# Altium PCB Bobokeros.PcbDoc
Units mm, origin at the board's own origin, x right, y up, seen from the top; angles counter-clockwise.
Board outline 100 x 50 mm, 2 copper layers (Top Layer, Bottom Layer); 68 components, 58 nets, 268 pads, 58 vias.
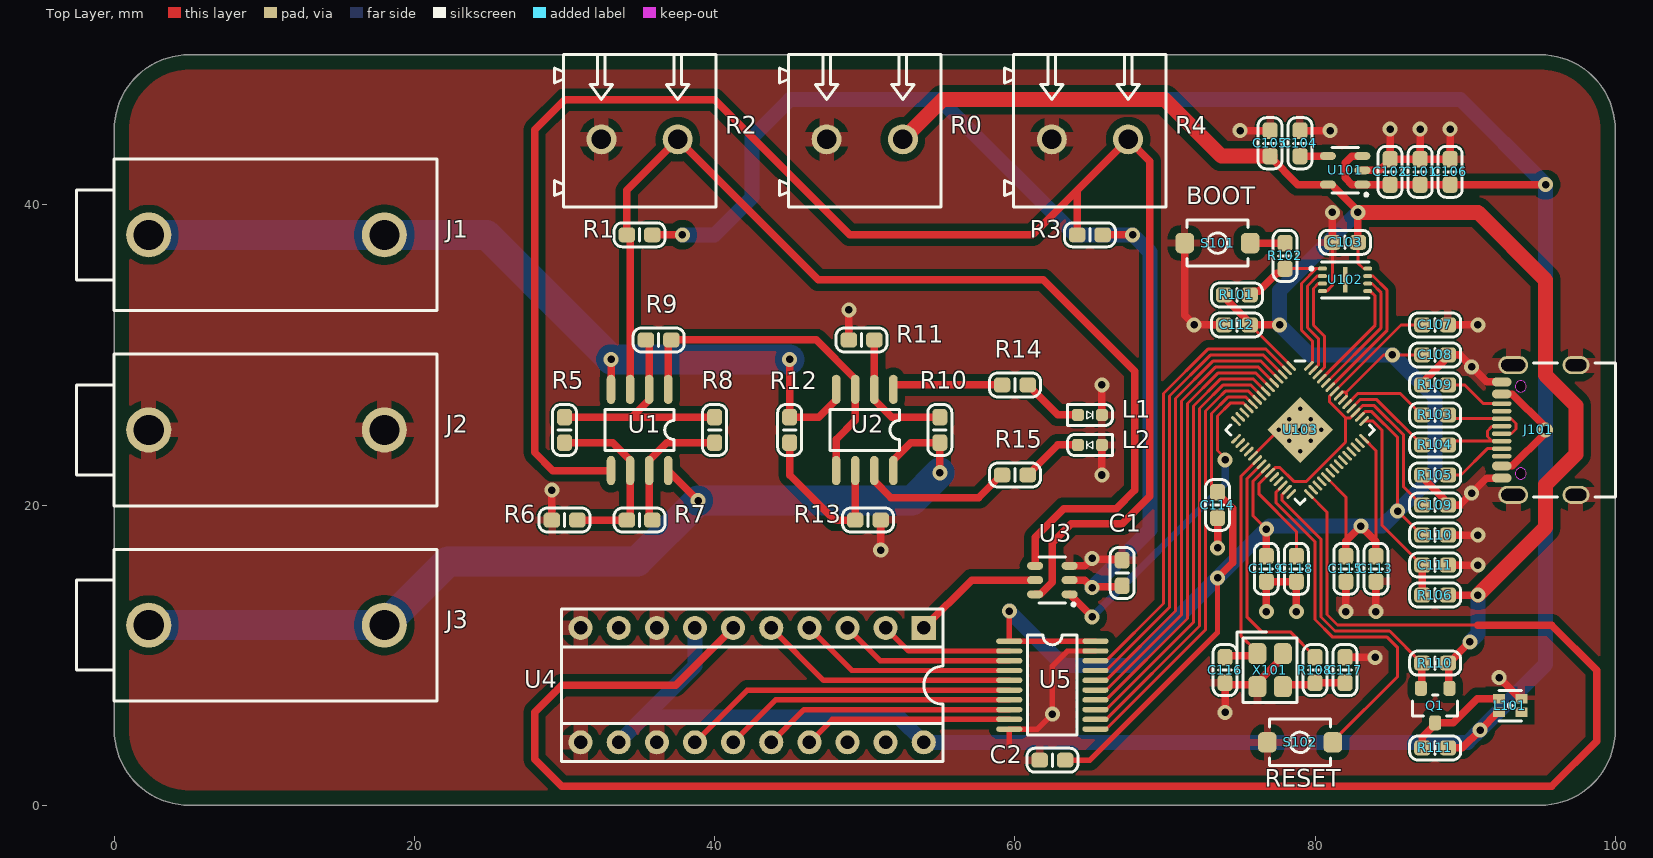
[diagram p0: Top Layer view]
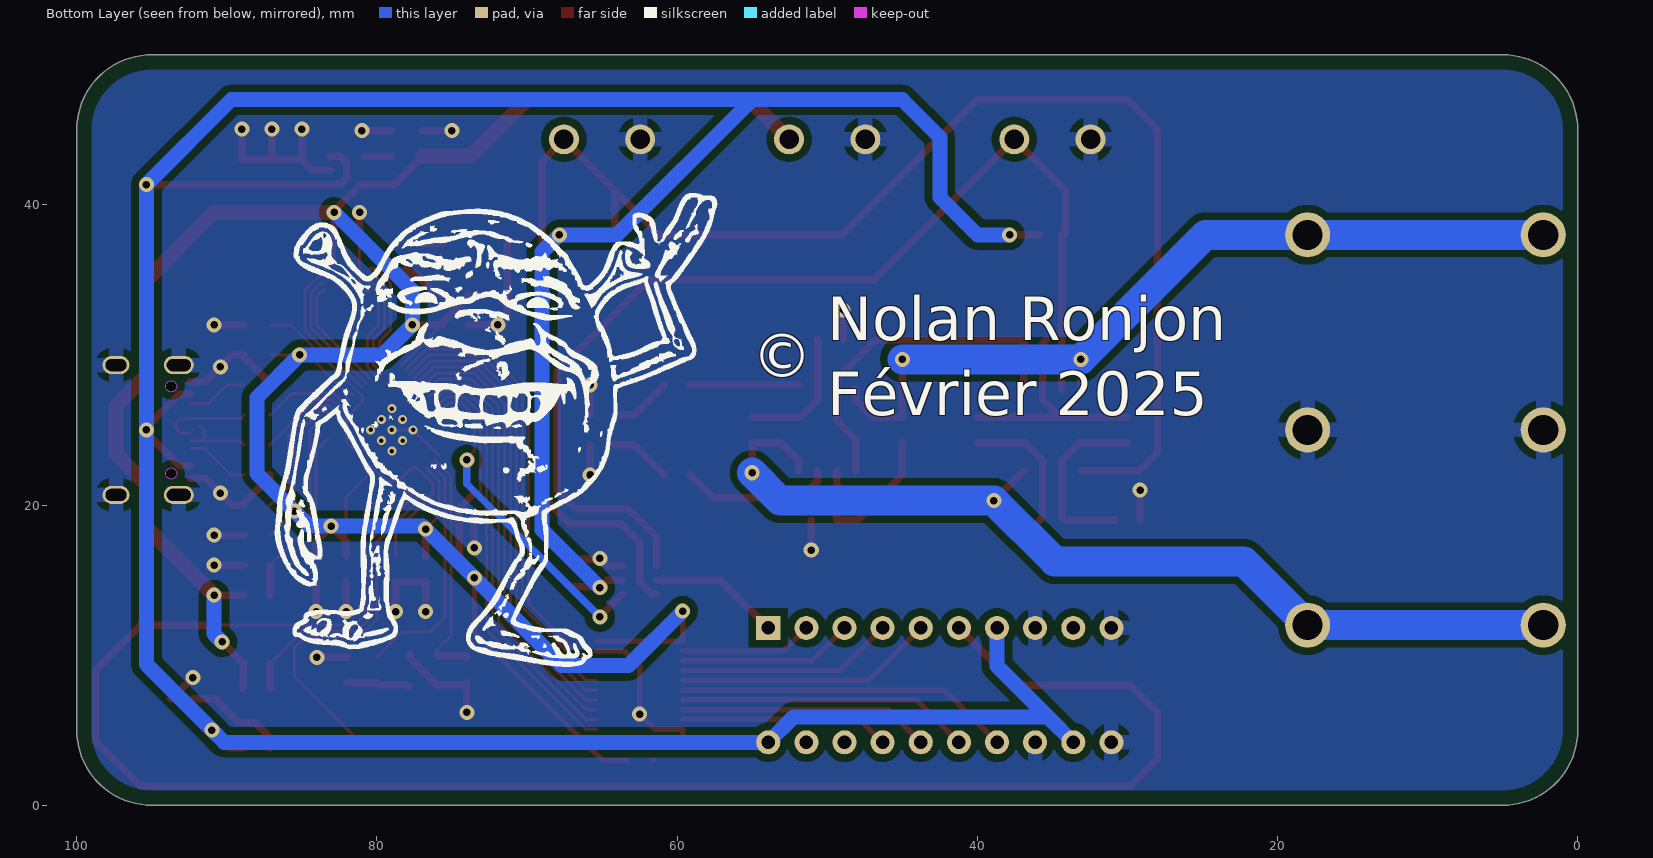
[diagram p1: Bottom Layer view, seen from below]

## Layer stack, top to bottom
Top Solder: solder mask 0.0102, Solder Resist, Dk 3.5
Top Layer: signal copper 0.0356
Dielectric 1: dielectric 0.32, FR-4, Dk 4.8
Bottom Layer: signal copper 0.0356
Bottom Solder: solder mask 0.0102, Solder Resist, Dk 3.5

## Board outline
0,5 0,45 cw(c5,45) 5,50 95,50 cw(c95,45) 100,45 100,5 cw(c95,5) 95,0 5,0 cw(c5,5)

## Design rules (kind name [scope] priority, off if disabled: settings)
BoardOutlineClearance [All] p1: gap=0 ignorepadtopadclearanceinfootprint=FALSE except(1: Poly-OutlineEdge Region-OutlineEdge)
Clearance [All] p1: gap=0.1 ignorepadtopadclearanceinfootprint=FALSE except(0.2: Track-Track Track-SMDPad; 0.5: Arc-Poly Track-Poly SMDPad-Poly THPad-Poly Via-Poly Fill-Poly Poly-Poly Poly-Region Poly-Text Poly-Hole)
ComponentClearance [All] p1: gap=0 collisioncheckmode=3 verticalgap=0 showdistances=FALSE
DiffPairsRouting [All] p1: maxlimit=1 minlimit=0.1 mostfreqgap=0.2 toplayer_minwidth=0.1 toplayer_maxwidth=1 toplayer_prefwidth=0.2 bottomlayer_minwidth=0.1 bottomlayer_maxwidth=1 bottomlayer_prefwidth=0.2 maxuncoupledlength=12.7
MinimumSolderMaskSliver [All] p1: minsoldermaskwidth=0
PlaneConnect [All] p1: pad.planeconnectstyle=Relief pad.reliefexpansion=1 pad.reliefentries=4 pad.reliefconductorwidth=0.5 pad.reliefairgap=0.5 via.planeconnectstyle=Direct via.reliefexpansion=1 via.reliefentries=4 via.reliefconductorwidth=0.5 via.reliefairgap=0.5
PolygonConnect [All] p1: thpad.connectstyle=Relief thpad.reliefconductorwidth=1 thpad.reliefentries=4 thpad.polygonreliefangle="90 Angle" thpad.airgapwidth=0.5 smdpad.connectstyle=Relief smdpad.reliefconductorwidth=0.5 smdpad.reliefentries=4 smdpad.polygonreliefangle="90 Angle" smdpad.airgapwidth=0.5 via.connectstyle=Direct via.reliefconductorwidth=0.254 via.reliefentries=4 via.polygonreliefangle="90 Angle" via.airgapwidth=0.254
RoutingVias [All] p1: holewidth=0.5 width=1 viastyle="Through Hole" minholewidth=0.2 minwidth=0.5 maxholewidth=1 maxwidth=2
SilkToSilkClearance [All] p1: silktosilkclearance=0
SilkToSolderMaskClearance [IsPad] p1: minsilkscreentomaskgap=0.1 clearancetoexposedcopper=TRUE
SolderMaskExpansion [All] p1: expansion=0.1 istentingtop=FALSE
SupplyNets "Schematic Supply Nets_5" [InNet('+5V')] p1: voltage=0.000
SupplyNets "Schematic Supply Nets_4" [InNet('GND')] p2: voltage=0.000
SupplyNets "Schematic Supply Nets_3" [InNet('+1.1V')] p3: voltage=0.000
SupplyNets "Schematic Supply Nets_2" [InNet('+3.3V')] p4: voltage=0.000
SupplyNets "Schematic Supply Nets_1" [InNet('-12V')] p5: voltage=0.000
SupplyNets "Schematic Supply Nets" [InNet('+12V')] p6: voltage=0.000
Width [All] p1: maxlimit=2 minlimit=0.1 preferedwidth=0.5
24 further rules are at their usual default settings.

## Classes and differential pairs
component class TraitementNumerique: C101 C102 C103 C104 C105 C106 C107 C108 C109 C110 C111 C112 C113 C114 C115 C116 C117 C118 C119 Condensateur J101 L101 Q1 R101 R102 R103 R104 R105 R106 R108 R109 R110 R111 S101 S102 U101 U102 U103 X101
component class TraitementAnalogique: C1 C2 Condensateur J1 J2 J3 L1 L2 R0 R1 R2 R3 R4 R5 R6 R7 R8 R9 R10 R11 R12 R13 R14 R15 U1 U2 U3 U4 U5
differential pair USB: +USB_P -USB_N

## Components (designator, comment, footprint, x,y, rotation, side; value= is the part's Value field where it differs from the comment)
C1 "Condensateur" 0603 67.149,15.475 r90 top value=100nF
C2 "Condensateur" 0603 62.5,3 r0 top value=100nF
C101 "Condensateur" 0603 87,42.2 r90 top locked value=2.2µF
C102 "Condensateur" 0603 85,42.2 r90 top locked value=2.2µF
C103 "Condensateur" 0603 82,37.5 r0 top locked value=1µF
C104 "Condensateur" 0603 79,44.1 r90 top locked value=100nF
C105 "Condensateur" 0603 77,44.1 r90 top locked value=1µF
C106 "Condensateur" 0603 89,42.2 r90 top locked value=2.2µF
C107 "Condensateur" 0603 88,32 r180 top locked value=22nF
C108 "Condensateur" 0603 88,30 r180 top locked value=100nF
C109 "Condensateur" 0603 88,20 r180 top locked value=2.2µF
C110 "Condensateur" 0603 88,18 r180 top locked value=2.2µF
C111 "Condensateur" 0603 88,16 r180 top locked value=2.2µF
C112 "Condensateur" 0603 74.793,32 r0 top locked value=100nF
C113 "Condensateur" 0603 84.05,15.75 r90 top value=100nF
C114 "Condensateur" 0603 73.5,20 r90 top locked value=100nF
C115 "Condensateur" 0603 82.05,15.75 r90 top value=100nF
C116 "Condensateur" 0603 74,9 r270 top locked value=15pF
C117 "Condensateur" 0603 82,9 r90 top locked value=15pF
C118 "Condensateur" 0603 78.75,15.75 r90 top locked value=100nF
C119 "Condensateur" 0603 76.75,15.75 r90 top locked value=100nF
J1 "Fiche Banane" "Fiche Banane" 10.15,38 r180 top locked
J2 "Fiche Banane" "Fiche Banane" 10.15,25 r180 top locked
J3 "Fiche Banane" "Fiche Banane" 10.15,12 r180 top locked
J101 "USB-C" USB-C 94.906,25 r90 top locked
L1 "LED Verte" "0603 (Pol)" 65,26 r180 top locked
L2 "LED Rouge" "0603 (Pol)" 65,24 r0 top locked
L101 "WS2812B" SMD1615 93,6.641 r180 top locked
Q1 "2N7002" SOT-23 88,6.641 r90 top locked
R0 "Resistance" Bornier 50,44.362 r0 top locked value=18Ω
R1 "Resistance" 0603 35,38 r0 top locked value=5kΩ
R2 "CTN" Bornier 35,44.362 r0 top locked value="5kΩ (25°C)"
R3 "Resistance" 0603 65,38 r0 top locked value=5kΩ
R4 "CTN" Bornier 65,44.362 r0 top locked value="5kΩ (25°C)"
R5 "Resistance" 0603 30,25 r90 top locked value=10kΩ
R6 "Resistance" 0603 30,19 r0 top locked value=100kΩ
R7 "Resistance" 0603 35,19 r180 top locked value=25kΩ
R8 "Resistance" 0603 40,25 r90 top locked value=25kΩ
R9 "Resistance" 0603 36.27,31 r180 top locked value=100kΩ
R10 "Resistance" 0603 55,25 r270 top locked value=10kΩ
R11 "Resistance" 0603 49.785,31 r0 top locked value=1kΩ
R12 "Resistance" 0603 45,25 r90 top locked value=10kΩ
R13 "Resistance" 0603 50.215,19 r180 top locked value=1kΩ
R14 "Resistance" 0603 60,28 r180 top locked value=600Ω
R15 "Resistance" 0603 60,22 r180 top locked value=600Ω
R101 "Resistance" 0603 74.793,34 r180 top locked value=NC
R102 "Resistance" 0603 78,36.6 r90 top locked value=1kΩ
R103 "Resistance" 0603 88,26 r0 top locked value=27Ω
R104 "Resistance" 0603 88,24 r0 top locked value=27Ω
R105 "Resistance" 0603 88,22 r0 top locked value=5.1kΩ
R106 "Resistance" 0603 88,14 r180 top locked value=200Ω
R108 "Resistance" 0603 80,9 r90 top locked value=1kΩ
R109 "Resistance" 0603 88,28 r0 top locked value=5.1kΩ
R110 "Resistance" 0603 88,9.466 r0 top locked value=10kΩ
R111 "Resistance" 0603 88,3.816 r0 top locked value=10kΩ
S101 "BOOT" Bouton 73.5,37.45 r0 top locked
S102 "RESET" Bouton 79,4.19 r180 top locked
U1 "TL082" SOIC-8 35,25 r180 top locked
U2 "TL082" SOIC-8 50,25 r180 top locked
U3 "TMUX1219" SOT-23-6 62.5,15 r90 top locked
U4 "ADC0820" DIP-20 42.5,8 r180 top locked
U5 "74LVC245A" TSSOP-20 62.5,8 r270 top locked
U101 "RT9013" SOT-23-5 82,42.3 r90 top locked
U102 "W25Q16JV" USON-8 82,35 r270 top locked
U103 "RP2040" QFN-56 79,25 r315 top locked
X101 "XTAL4" SMD3225 77,9 r270 top locked value=12MHz
? "Comment" Sorbonne 10.15,21.6 r90 bottom
? "Comment" "Shreksobob & Signature" 72,25 r180 bottom

## Footprints (in the part's own frame and the unit in brackets; to place one, negate y for a bottom-side part, rotate by r counter-clockwise, add the part's x,y. Pads: shape width x height; smd on the part's side, far side on the other; paste and mask are expansions set on the pad)
0603 [mm]
  rrect50% 1.1x1 smd: 1(-0.85,0) 2(0.85,0)
  silkscreen extent -1.7,-0.8 1.7,0.8
"0603 (Pol)" [mm]
  rrect50% 0.8x0.8 smd: 1(0.8,0) 2(-0.8,0)
  silkscreen extent -1.5,-0.7 1.5,0.7
Bornier [mm]
  round 2 hole 1.3: 1(-2.54,0) 2(2.54,0)
  silkscreen extent -5.68,-4.52 5.08,5.64
Bouton [mm]
  rrect50% 1.23x1.36 smd: 1(-2.185,0) 2(2.185,0)
  silkscreen extent -2.03,-1.54 2.03,1.54
DIP-20 [mm]
  rect 1.6x1.6 hole 0.9: 1(-11.43,-3.81)
  round 1.6 hole 0.9: 2(-8.89,-3.81) 3(-6.35,-3.81) 4(-3.81,-3.81) 5(-1.27,-3.81) 6(1.27,-3.81) 7(3.81,-3.81) 8(6.35,-3.81) 9(8.89,-3.81) 10(11.43,-3.81) 11(11.43,3.81) 12(8.89,3.81) 13(6.35,3.81) 14(3.81,3.81) 15(1.27,3.81) 16(-1.27,3.81) 17(-3.81,3.81) 18(-6.35,3.81) 19(-8.89,3.81) 20(-11.43,3.81)
  silkscreen extent -12.7,-5.08 12.7,5.08
"Fiche Banane" [mm]
  round 3 hole 2: 1(-7.85,0) 2(7.85,0)
  silkscreen extent -11.35,-5.05 12.65,5.05
QFN-56 [mm]
  oval 0.84x0.2 smd: 1(-3.435,2.6) 2(-3.435,2.2) 3(-3.435,1.8) 4(-3.435,1.4) 5(-3.435,1) 6(-3.435,0.6) 7(-3.435,0.2) 8(-3.435,-0.2) 9(-3.435,-0.6) 10(-3.435,-1) 11(-3.435,-1.4) 12(-3.435,-1.8) 13(-3.435,-2.2) 14(-3.435,-2.6) 29(3.435,-2.6) 30(3.435,-2.2) 31(3.435,-1.8) 32(3.435,-1.4) 33(3.435,-1) 34(3.435,-0.6) 35(3.435,-0.2) 36(3.435,0.2) 37(3.435,0.6) 38(3.435,1) 39(3.435,1.4) 40(3.435,1.8) 41(3.435,2.2) 42(3.435,2.6)
  oval 0.2x0.84 smd: 15(-2.6,-3.435) 16(-2.2,-3.435) 17(-1.8,-3.435) 18(-1.4,-3.435) 19(-1,-3.435) 20(-0.6,-3.435) 21(-0.2,-3.435) 22(0.2,-3.435) 23(0.6,-3.435) 24(1,-3.435) 25(1.4,-3.435) 26(1.8,-3.435) 27(2.2,-3.435) 28(2.6,-3.435) 43(2.6,3.435) 44(2.2,3.435) 45(1.8,3.435) 46(1.4,3.435) 47(1,3.435) 48(0.6,3.435) 49(0.2,3.435) 50(-0.2,3.435) 51(-0.6,3.435) 52(-1,3.435) 53(-1.4,3.435) 54(-1.8,3.435) 55(-2.2,3.435) 56(-2.6,3.435)
  rect 3.1x3.1 smd paste-0.57: 57(0,0)
  silkscreen extent -3.5,-3.5 3.5,3.5
"Shreksobob & Signature" [mm]
  silkscreen extent -14.81,-15.77 14.66,15.78
SMD1615 [mm]
  rect 0.8x0.65 smd paste+0 mask+0.05: 1(-0.75,0.45) 2(0.75,0.45) 3(-0.75,-0.45) 4(0.75,-0.45)
  silkscreen extent -0.76,-1.02 0.76,1.02
SMD3225 [mm]
  rrect50% 1.4x1.2 smd: 1(-1.1,-0.85) 2(1.1,-0.85) 3(1.1,0.85) 4(-1.1,0.85)
  silkscreen extent -2.55,-2.2 2.16,1.81
SOIC-8 [mm]
  oval 0.568x1.95 smd: 1(-1.905,-2.705) 2(-0.635,-2.705) 3(0.635,-2.705) 4(1.905,-2.705) 5(1.905,2.705) 6(0.635,2.705) 7(-0.635,2.705) 8(-1.905,2.705)
  silkscreen extent -2.31,-1.37 2.31,1.37
Sorbonne [mm]
SOT-23 [mm]
  rrect50% 1x0.8 smd: 1(1.15,-0.95) 2(1.15,0.95) 3(-1.15,0)
  silkscreen extent -0.7,-1.5 0.7,1.5
SOT-23-5 [mm]
  oval 0.532x1.072 smd: 1(-0.95,-1.149) 2(0,-1.149) 3(0.95,-1.149) 4(0.95,1.149) 5(-0.95,1.149)
  silkscreen extent -1.73,-1.51 1.53,0.89
SOT-23-6 [mm]
  oval 0.532x1.072 smd: 1(-0.95,-1.149) 2(0,-1.149) 3(0.95,-1.149) 4(0.95,1.149) 5(0,1.149) 6(-0.95,1.149)
  silkscreen extent -1.73,-1.51 1.53,0.89
TSSOP-20 [mm]
  oval 0.364x1.742 smd: 1(-2.925,-2.871) 2(-2.275,-2.871) 3(-1.625,-2.871) 4(-0.975,-2.871) 5(-0.325,-2.871) 6(0.325,-2.871) 7(0.975,-2.871) 8(1.625,-2.871) 9(2.275,-2.871) 10(2.925,-2.871) 11(2.925,2.871) 12(2.275,2.871) 13(1.625,2.871) 14(0.975,2.871) 15(0.325,2.871) 16(-0.325,2.871) 17(-0.975,2.871) 18(-1.625,2.871) 19(-2.275,2.871) 20(-2.925,2.871)
  silkscreen extent -3.33,-1.64 3.33,1.64
USB-C [mm]
  oval 0.6x1.3 smd: A1/B12(-3.2,2.474) A4/B9(-2.4,2.474) A9/B4(2.4,2.474) A12/B1(3.2,2.474)
  oval 0.3x1.3 smd: A5(-1.25,2.474) A6(-0.25,2.474) A7(0.25,2.474) A8(1.25,2.474) B5(1.75,2.474) B6(0.75,2.474) B7(-0.75,2.474) B8(-1.75,2.474)
  oval 1.2x1.8 hole 0.8 slot 1.4 at 90 deg: MTB(-4.325,-2.474) MTB(4.325,-2.474)
  oval 1.2x2 hole 0.8 slot 1.6 at 90 deg: MTB(-4.325,1.706) MTB(4.325,1.706)
  Keep-Out Layer board cut-out: 3.275,1.206 3.238,1.368 3.134,1.499 2.983,1.571 2.816,1.571 2.666,1.499 2.562,1.368 2.525,1.206 2.525,1.206 2.562,1.043 2.666,0.912 2.816,0.84 2.983,0.84 3.134,0.912 3.238,1.043 3.275,1.206
  Keep-Out Layer board cut-out: -2.525,1.206 -2.562,1.368 -2.666,1.499 -2.817,1.571 -2.983,1.571 -3.134,1.499 -3.238,1.368 -3.275,1.206 -3.275,1.206 -3.238,1.043 -3.134,0.912 -2.983,0.84 -2.817,0.84 -2.666,0.912 -2.562,1.043 -2.525,1.206
  silkscreen extent -4.47,-5.09 4.47,0.36
USON-8 [mm]
  oval 0.28x0.6 smd: 1(-0.75,-1.507) 2(-0.25,-1.507) 3(0.25,-1.507) 4(0.75,-1.507) 5(0.75,1.507) 6(0.25,1.507) 7(-0.25,1.507) 8(-0.75,1.507)
  rect 1.7x0.3 smd: ""(0,0)
  silkscreen extent -1.2,-2.35 1.2,1.58

## Part data
J1: "Connecteur", JLCPCB Part=C7437325, Manufacturer Part=24.243.5
J2: "Connecteur", JLCPCB Part=C7437322, Manufacturer Part=24.243.2
J3: "Connecteur", JLCPCB Part=C7437321, Manufacturer Part=24.243.1
J101: "Connecteur", JLCPCB Part=C165948, Manufacturer Part=TYPE-C-31-M-12
L1: "LED", JLCPCB Part=C965804, Manufacturer Part=XL-1608UGC-04
L2: "LED", JLCPCB Part=C965799, Manufacturer Part=XL-1608SURC-06
L101: "LED RGB", JLCPCB Part=C5349954, Manufacturer Part=XL-1615RGBC-WS2812B
Q1: "MOSFET", JLCPCB Part=C85047, Manufacturer Part=2N7002K-7
R0: JLCPCB Part=C8465, Manufacturer Part=WJ500V-5.08-2P
R2 R4: "Thermistance", JLCPCB Part=C8465, Manufacturer Part=WJ500V-5.08-2P
S101 S102: library part Bouton, "Bouton", JLCPCB Part=C720477, Manufacturer Part=TS-1088-AR02016
U1 U2: "AOP", JLCPCB Part=C6966, Manufacturer Part=TL082IDR
U3: "Multiplexeur analogique", JLCPCB Part=C2869838, Manufacturer Part=TMUX1219DBVR
U4: "CAN (8 bit)", JLCPCB Part=C72127, Manufacturer Part=DS1001-01-20BT1NSF6S-JKB
U5: "Buffer bidirectionnel", JLCPCB Part=C7848, Manufacturer Part=SN74LVC245APWR
U101: "Régulateur de tension", JLCPCB Part=C47773, Manufacturer Part=RT9013-33GB
U102: "Flash", JLCPCB Part=C2843335, Manufacturer Part=W25Q16JVUXIQ
U103: "Microcontroleur", JLCPCB Part=C2040, Manufacturer Part=RP2040
X101: "Crystal", JLCPCB Part=C20625731, Manufacturer Part=ABM8-272-T3

## Via types
v1: diameter 1, hole 0.5, Top Layer to Bottom Layer, tented both sides, 49 vias
v2: diameter 0.6, hole 0.3, Top Layer to Bottom Layer, tented both sides, 9 vias

## Nets (pads, with @x,y where several pads share a name; then routed paths per layer and width w, separated by ;. In a path a pad name is that pad's centre, name@x,y a point inside that pad or via, vN(x,y) a via of type N, cw(c..) or ccw(c..) an arc to the next point about the centre after c; other vN are vias at no path point)
+1.1V: C107.2 C109.2 C118.2 U103.23 U103.45 U103.50 | length 35.4
  Top Layer w0.2: C118.2 78.75,18.243 76.25,20.743 76.25,21.401 U103.23 77.339,22.49 77.67,22.49 78.579,21.581 79.421,21.581 82.027,24.187 82.027,25.813 ; C109.2 87.1,20 85.9,21.2 85.9,24.666 83.949,26.617 83.162,26.617 U103.45 82.358,25.813 82.027,25.813 ; C107.2 85.717,32 U103.50 80.944,27.227 80.944,26.896 82.027,25.813
+3.3V: C2.2 C103.2 C105.1 C108.2 C110.2 C112.2 C113.2 C114.2 C115.2 C119.2 Q1.1 R0.2 R101.2 R106.1 R110.2 U5.1 U5.20 U101.5 U102.8 U103.1 U103.10 U103.22 U103.33 U103.42 U103.44 U103.48 U103.49 | length 238.8
  Top Layer w0.2: C114.2@73.1,20.85 73.1,26.1 74.182,27.182 75.403,27.182 U103.10 ; C112.2@75.677,32 U103.1 ; U103.22 75.85,21.567 75.85,19.3 v1(76.75,18.4) ; U103.33 82.05,20.536 82.05,17.6 ; U103.49 81.797,27.514 81.986,27.514 82.033,27.467 ; U103.48 82.079,27.231 82.079,27.421 82.033,27.467 ; C103.2 82.85,36.125 83.225,35.75 U102.8 ; U103.44 83.328,26.217 83.783,26.217 85.5,24.5 v1(85.5,19.6) 87.1,18 C110.2 ; U103.42 84.05,23.627 84.05,17.6 ; C108.2 v1(85.15,30) 84.566,30 82.033,27.467
  Top Layer w0.364: v1(59.629,12.925) U5.1 U5.20 ; C2.2 65,3 73.5,11.5 v1(73.5,15.15)
  Top Layer w0.5: v1(73.5,15.15) 74.5,16.15 74.5,19.8 73.5,20.8 C114.2 ; R101.2 73.943,33.85 C112.2@75.643,32.15 ; C112.2 75.677,32 v1(77.643,32) ; C119.2 v1(76.75,18.4) ; C105.1 77,43.2 78.85,41.35 U101.5 81.112,41.35 82.85,39.612 v1(82.85,39.5) C103.2@82.85,37.534 ; C115.2 82.05,17.6 v1(83.05,18.6) 84.05,17.6 C113.2 ; R110.2 88.9,9.466 v1(90.314,10.88) ; R106.1 v1(90.85,14) ; R110.2@88.9,9.416 88.9,7.841 Q1.1
  Top Layer w1: R0.2 55.178,47 70,47 73.75,43.25 C105.1 ; v1(82.85,39.5) 90.85,39.5 95.351,34.999 95.351,28.649 97.38,26.62 97.38,23.38 95.351,21.351 95.351,18.501 v1(90.85,14)
  Bottom Layer w1: v1(59.629,12.925) 63.241,9.313 67.663,9.313 v1(73.5,15.15) v1(76.75,18.4) 76.95,18.6 v1(83.05,18.6) 84.5,18.6 v1(85.5,19.6) 88,22.1 88,27.15 v1(85.15,30) 79.643,30 v1(77.643,32) 77.643,34.293 v1(82.85,39.5) ; v1(90.314,10.88) 90.85,11.416 v1(90.85,14)
+5V: C1.1 C101.1 C102.1 C106.1 J101.A4/B9 J101.A9/B4 L101.2 R1.2 R3.2 R111.2 U3.2 U4.7 U4.12 U4.20 U101.1 U101.3 | length 248.7
  Top Layer w0.5: R1.2 v1(37.85,38) ; U3.2 64.649,15 v1(65.149,14.5) 65.212,14.563 67.087,14.563 C1.1 ; R3.2 v1(67.85,38) ; U101.3 82.45,43.25 82,42.8 82,41.8 82.45,41.35 U101.1 C102.1 C101.1 C106.1 v1(95.351,41.35) ; R111.2 88.857,3.823 89.807,3.823 v1(90.991,5.007) 92.175,6.191 L101.2 ; J101.A4/B9 92.451,22.619 93.15,22.619 95.255,24.725 95.255,25.084 95.351,25.18 95.307,25.18 95.255,25.231 95.255,25.275 93.15,27.381 92.451,27.381 J101.A9/B4
  Bottom Layer w1: U4.12 35.3,5.88 ; v1(37.85,38) 40,38 42.5,40.5 42.5,44.5 45,47 55,47 ; U4.7 38.69,9.27 35.3,5.88 ; v1(65.149,14.5) 69,18.351 69,36.85 v1(67.85,38) ; v1@67.807,38 64,38 55,47 ; 35.3,5.88 52.24,5.88 U4.20 90.174,4.19 v1(90.991,5.007) 95.351,9.367 v1(95.351,25) v1(95.351,41.35) 89.701,47 55,47
+12V: J3.1 J3.2 R10.2 U1.8 U2.8 | length 66
  Top Layer w0.5: U1.8 v1(38.905,20.295) ; U2.8 51.905,22.986 53.069,24.15 R10.2 v1(55,22.15)
  Bottom Layer w2: J3.2 J3.1 22.243,16.243 34.853,16.243 v1(38.905,20.295) 53.145,20.295 v1(55,22.15)
-12V: J1.1 J1.2 R12.2 U1.4 U2.4 | length 56.3
  Top Layer w0.5: U1.4 v1(33.095,29.705) ; v1(45,29.705) R12.2 46.931,25.85 48.095,27.014 U2.4
  Bottom Layer w2: J1.2 J1.1 24.8,38 v1(33.095,29.705) v1(45,29.705)
GND: C1.2 C2.1 C101.2 C102.2 C103.1 C104.2 C105.2 C106.2 C107.1 C108.1 C109.1 C110.1 C111.1 C112.1 C113.1 C114.1 C115.1 C116.2 C117.2 C118.1 C119.1 J2.1 J2.2 J101.A1/B12 J101.A12/B1 J101.MTB L1.2 L2.1 L101.3 R0.1 R2.1 R4.1 R6.1 R11.1 R13.1 R105.1 R109.1 S101.1 S102.2 U3.3 U4.8 U4.10 U4.11 U4.13 U5.10 U5.19 U101.2 U102.4 U103.19 U103.57 X101.2 X101.4 | length 100.9
  Top Layer w0.2: U103.19 v2(77.586,25) v2(79,25) ; U102.4 80.775,34.25 81.15,34.625 C103.1
  Top Layer w0.364: 59.629,4.075 U5.10 61.5,5.075 v1(62.5,6.075) 62.5,9.275 63.5,10.275 U5.19 ; C2.1@61.6,3 C2.1
  Top Layer w0.5: R6.1 v1(29.15,21) ; R11.1 v1(48.935,33) ; v1(51.065,17) R13.1 ; U3.3 64.649,15.95 v1(65.149,16.45) 65.212,16.388 67.086,16.388 C1.2 ; v1(65.8,22) L2.1 ; L1.2 v1(65.8,28) ; S101.1 71.315,32.628 v1(71.943,32) C112.1 ; v1(73.5,17.15) C114.1 ; v1(74,6.19) C116.2 74.125,8.025 76.025,8.025 77.85,9.85 X101.4 ; v1(75,44.95) C105.2 ; v1(76.75,12.9) C119.1 C118.1 v1(78.75,12.9) ; C104.2 v1(81,44.95) ; C103.1@81.15,37.534 v1(81.15,39.5) ; C117.2 v1(84,9.85) ; v1(82.05,12.9) C115.1 ; U101.2 84.3,42.3 C102.2@85,43 ; v1(84.05,12.9) C113.1 ; v1(85,45.05) C102.2 C101.2 ; v1(87,45.05) C101.2 ; R105.1 87.15,21.85 88.85,20.15 C109.1 89.632,20 v1(90.432,20.8) 91.432,21.8 J101.A1/B12 ; R109.1 87.15,28.15 88.85,29.85 C108.1 89.632,30 v1(90.432,29.2) 91.432,28.2 J101.A12/B1 ; C111.1 v1(90.85,16) ; C110.1 v1(90.85,18) ; C107.1 v1(90.85,32) ; v1(89,45.05) C106.2 C101.2 ; v1(92.261,8.505) 93.675,7.091 L101.3
  other v2: 79,23.586 78.293,24.293 79.707,24.293 80.414,25 78.293,25.707 79.707,25.707 79,26.414
NetC104_1: C104.1 U101.4 | length 1.9
  Top Layer w0.5: C104.1 U101.4
NetC111_2: C111.2 R106.2 U103.43 | length 13.6
  Top Layer w0.2: U103.43 83.844,25.59 84.45,24.984 84.45,18.65 87.1,16 C111.2
  Top Layer w0.5: R106.2 C111.2
NetC116_1: C116.1 U103.20 X101.1 | length 16
  Top Layer w0.2: X101.1@76.025,9.975 76.025,10.325 75.05,11.3 75.05,21.899 U103.20
  Top Layer w0.5: C116.1 74.125,9.975 X101.1@76.025,9.975
NetC117_1: C117.1 R108.1 X101.3 | length 4.3
  Top Layer w0.5: X101.3 77.975,8.025 79.875,8.025 R108.1 C117.1
NetJ101_A5: J101.A5 R105.2 | length 4.3
  Top Layer w0.2: R105.2 89.722,22 91.472,23.75 J101.A5
NetJ101_A6: J101.A6 J101.B6 R103.2 | length 6.2
  Top Layer w0.2: R103.2 89.1,25.75 J101.B6 92.451,25.731 93.088,25.731 93.382,25.436 93.382,25.064 93.088,24.769 92.451,24.769 J101.A6
NetJ101_A7: J101.A7 J101.B7 R104.2 | length 5.6
  Top Layer w0.2: R104.2 89.1,24.25 J101.B7 92.413,24.269 91.776,24.269 91.482,24.564 91.482,24.936 91.776,25.231
NetJ101_B5: J101.B5 R109.2 | length 4.1
  Top Layer w0.2: R109.2 89.972,28 91.222,26.75 J101.B5
NetL1_1: L1.1 R14.1 | length 4.2
  Top Layer w0.5: R14.1 62.85,26 L1.1
NetL2_2: L2.2 R15.1 | length 4.2
  Top Layer w0.5: R15.1 62.85,24 L2.2
NetL101_4: L101.4 Q1.3 R111.1 | length 7.2
  Top Layer w0.5: R111.1 87.15,4.541 88.1,5.491 89.2,5.491 90.8,7.091 L101.4 ; R111.1@87.2,3.816 R111.1@87.45,4.066
NetQ1_2: Q1.2 R110.1 U103.27 | length 19.4
  Top Layer w0.2: U103.27 77.783,20.672 77.783,20.341 80.4,17.724 80.4,12.534 81.334,11.6 84.966,11.6 R110.1@87.1,9.466 ; R110.1@87.1,9.466 R110.1
  Top Layer w0.5: Q1.2 87.1,7.841 87.1,9.416 R110.1
NetR1_1: R1.1 R2.2 U1.3 U3.4 | length 72.7
  Top Layer w0.5: R1.1 34.15,40.972 R2.2 46.902,35 61.902,35 68,28.902 68,21 66.75,19.75 63.25,19.75 61.351,17.851 U3.4 ; U1.3 R1.1@34.365,38
NetR3_1: R3.1 R4.2 U1.5 U3.6 | length 113.1
  Top Layer w0.5: U1.5 29.205,22.295 28,23.5 28,45 30,47 40,47 49,38 61.178,38 64.15,40.972 ; U3.6 61.684,14.05 62.5,14.866 62.5,17.5 63.75,18.75 67.164,18.75 69,20.586 69,42.902 R4.2 64.15,40.972 ; R3.1 64.15,40.972
NetR5_1: R5.1 R6.2 R7.2 U1.6 | length 12.2
  Top Layer w0.5: R5.1 33.201,24.15 34.365,22.986 34.365,19.215 R7.2 R6.2
NetR5_2: R5.2 R8.2 R9.2 U1.2 | length 15.7
  Top Layer w0.5: R5.2 34.471,25.85 ; R9.2 35.635,30.785 35.635,27.014 34.471,25.85 ; R8.2 34.471,25.85
NetR7_1: R7.1 R8.1 U1.7 | length 8.9
  Top Layer w0.5: R7.1 35.648,19.202 35.648,22.282 U1.7 35.635,22.986 36.799,24.15 R8.1
NetR9_1: R9.1 U1.1 U2.3 U2.5 | length 23.3
  Top Layer w0.5: U1.1 36.905,30.785 R9.1 46.761,31 49.365,28.396 49.365,25.635 48.095,24.365 U2.5
NetR10_1: R10.1 R11.2 U2.2 | length 8.8
  Top Layer w0.5: R11.2 50.635,27.014 51.799,25.85 R10.1
NetR12_1: R12.1 R13.2 U2.6 | length 11.1
  Top Layer w0.5: R12.1 45,22 48,19 R13.2 U2.6
NetR14_2: R14.2 U2.1 | length 7.2
  Top Layer w0.5: U2.1@51.905,28 R14.2
NetR15_2: R15.2 U2.7 | length 10.3
  Top Layer w0.5: U2.7 50.635,21.604 51.739,20.5 57.6,20.5 59.1,22 R15.2
NetR101_1: R101.1 R102.1 U102.1 U103.56 | length 12.9
  Top Layer w0.2: R102.1 80.079,35.75 ; U103.56 79.817,29.494 79.817,30.924 79.093,31.648 79.093,34.764 80.079,35.75 ; U102.1 80.079,35.75
  Top Layer w0.5: R101.1 75.893,34.25 76.25,34.25 77.45,35.45 77.75,35.45 78,35.7 R102.1
NetR102_2: R102.2 S101.2 | length 2.3
  Top Layer w0.5: S101.2 R102.2
NetR108_2: R108.2 U103.21 | length 16.3
  Top Layer w0.2: U103.21 75.45,21.733 75.45,12.55 76.45,11.55 78.35,11.55 80,9.9 R108.2
NetS102_1: S102.1 U103.26 | length 24.6
  Top Layer w0.2: U103.26 77.383,20.838 77.383,20.175 80,17.558 80,12.369 81.169,11.2 84.8,11.2 85.5,10.5 85.5,8.57 81.185,4.255 S102.1
NetU3_1: U3.1 U103.11 | length 22
  Top Layer w0.2: v1(74,23) 74,23.131 73.5,23.631 73.5,25.934 74.348,26.782 75.238,26.782 U103.11
  Top Layer w0.5: U3.1 v1(65.149,12.55)
  Bottom Layer w0.5: v1(65.149,12.55) 74,21.401 v1(74,23)
NetU3_5: U3.5 U4.1 | length 8.7
  Top Layer w0.5: U4.1 57.12,15 U3.5
NetU4_2: U4.2 U5.2 | length 8.9
  Top Layer w0.364: U4.2 52.925,10.275 U5.2
NetU4_3: U4.3 U5.3 | length 11.7
  Top Layer w0.364: U4.3 51.035,9.625 U5.3
NetU4_4: U4.4 U5.4 | length 14.5
  Top Layer w0.364: U4.4 49.145,8.975 U5.4
NetU4_5: U4.5 U5.5 | length 17.3
  Top Layer w0.364: U4.5 47.255,8.325 U5.5
NetU4_6: U4.6 U103.29 | length 124.2
  Top Layer w0.2: U103.29 80.8,19.523 80.8,12.7 81.5,12 90.85,12
  Top Layer w0.5: U4.6 37.42,8 29.8,8 28,6.2 28,3.05 29.8,1.25 95.75,1.25 98.75,4.25 98.75,9 95.75,12 90.85,12
NetU4_14: U4.14 U5.6 | length 22.4
  Top Layer w0.364: U4.14 42.175,7.675 U5.6
NetU4_15: U4.15 U5.7 | length 19.6
  Top Layer w0.364: U4.15 44.065,7.025 U5.7
NetU4_16: U4.16 U5.8 | length 16.8
  Top Layer w0.364: U4.16 45.955,6.375 U5.8
NetU4_17: U4.17 U5.9 | length 14
  Top Layer w0.364: U4.17 47.845,5.725 U5.9
NetU5_11: U5.11 U103.9 | length 28.9
  Top Layer w0.2: U5.11 66.092,5.075 72.7,11.683 72.7,26.266 73.5,27.066 74.017,27.582 75.569,27.582 U103.9
NetU5_12: U5.12 U103.8 | length 29.1
  Top Layer w0.2: U5.12 66.092,5.725 72.3,11.933 72.3,26.431 72.5,26.631 73.851,27.982 75.735,27.982 U103.8
NetU5_13: U5.13 U103.7 | length 29.2
  Top Layer w0.2: U5.13 66.092,6.375 71.9,12.183 71.9,26.597 72,26.697 73.685,28.382 75.9,28.382 U103.7
NetU5_14: U5.14 U103.6 | length 29.4
  Top Layer w0.2: U5.14 66.092,7.025 71.5,12.433 71.5,26.763 73.52,28.782 76.066,28.782 U103.6
NetU5_15: U5.15 U103.5 | length 29.6
  Top Layer w0.2: U5.15 66.092,7.675 71.1,12.683 71.1,26.928 73.354,29.182 76.232,29.182 U103.5
NetU5_16: U5.16 U103.4 | length 29.8
  Top Layer w0.2: U5.16 66.092,8.325 70.7,12.933 70.7,27.094 73.188,29.582 76.398,29.582 U103.4
NetU5_17: U5.17 U103.3 | length 30
  Top Layer w0.2: U5.17 66.092,8.975 70.3,13.183 70.3,27.26 73.023,29.982 76.563,29.982 U103.3
NetU5_18: U5.18 U103.2 | length 30.1
  Top Layer w0.2: U5.18 66.092,9.625 69.9,13.433 69.9,27.425 72.857,30.382 76.729,30.382 U103.2
NetU102_2: U102.2 U103.55 | length 7.3
  Top Layer w0.2: U103.55 80.217,29.328 80.217,31.09 79.493,31.814 79.493,34.598 80.145,35.25 U102.2
NetU102_3: U102.3 U103.54 | length 7
  Top Layer w0.2: U103.54 80.617,29.162 80.617,31.256 79.893,31.98 79.893,34.432 80.21,34.75 U102.3
NetU102_5: U102.5 U103.53 | length 7.6
  Top Layer w0.2: U103.53 84,31.98 84,33.917 83.667,34.25 U102.5
NetU102_6: U102.6 U103.52 | length 8.7
  Top Layer w0.2: U103.52 84.4,31.814 84.4,34.14 83.79,34.75 U102.6
NetU102_7: U102.7 U103.51 | length 9.7
  Top Layer w0.2: U103.51 84.8,31.649 84.8,34.305 83.855,35.25 U102.7
USB_N: R104.1 U103.46 | length 6.2
  Top Layer w0.2: U103.46 82.997,27.017 84.115,27.017 87.131,24 R104.1
USB_P: R103.1 U103.47 | length 5.9
  Top Layer w0.2: U103.47 82.831,27.417 85.683,27.417 87.1,26 R103.1
pads on no net: J101.A8 J101.B8 L101.1 U4.9 U4.18 U4.19 U102. U103.12 U103.13 U103.14 U103.15 U103.16 U103.17 U103.18 U103.24 U103.25 U103.28 U103.30 U103.31 U103.32 U103.34 U103.35 U103.36 U103.37 U103.38 U103.39 U103.40 U103.41

## Polygon pours and split planes (outlines as drawn)
GND on Bottom Layer "GND_L02_P001" (solid, remove dead copper, pour order 1): 0,5 0,45 cw(c5,45) 5,50 95,50 cw(c95,45) 100,45 100,5 cw(c95,5) 95,0 5,0 cw(c5,5)
GND on Top Layer "GND_L01_P002" (solid, remove dead copper, pour order 2): 0,5 0,45 cw(c5,45) 5,50 95,50 cw(c95,45) 100,45 100,5 cw(c95,5) 95,0 5,0 cw(c5,5)

## Silkscreen, mask and mechanical layers (free items; w line width, h text height)
Mechanical 1:
  the board outline again, w1

## Text inside footprints (layer, text, board x,y; h text height)
?: Bottom Overlay "Nolan Ronjon / Février 2025" at 50,25 h5; Bottom Overlay "©" at 54.998,27.542 h5